# Altium PCB 3轴5.2-PCB-V3.3-2023.10.27.PcbDoc (part 1 of 2)
Units mm, origin at the board's own origin, x right, y up, seen from the top; angles counter-clockwise.
Board outline 152.4 x 101.6 mm, 2 copper layers (Top Layer, Bottom Layer); 198 components, 135 nets, 711 pads, 633 vias.
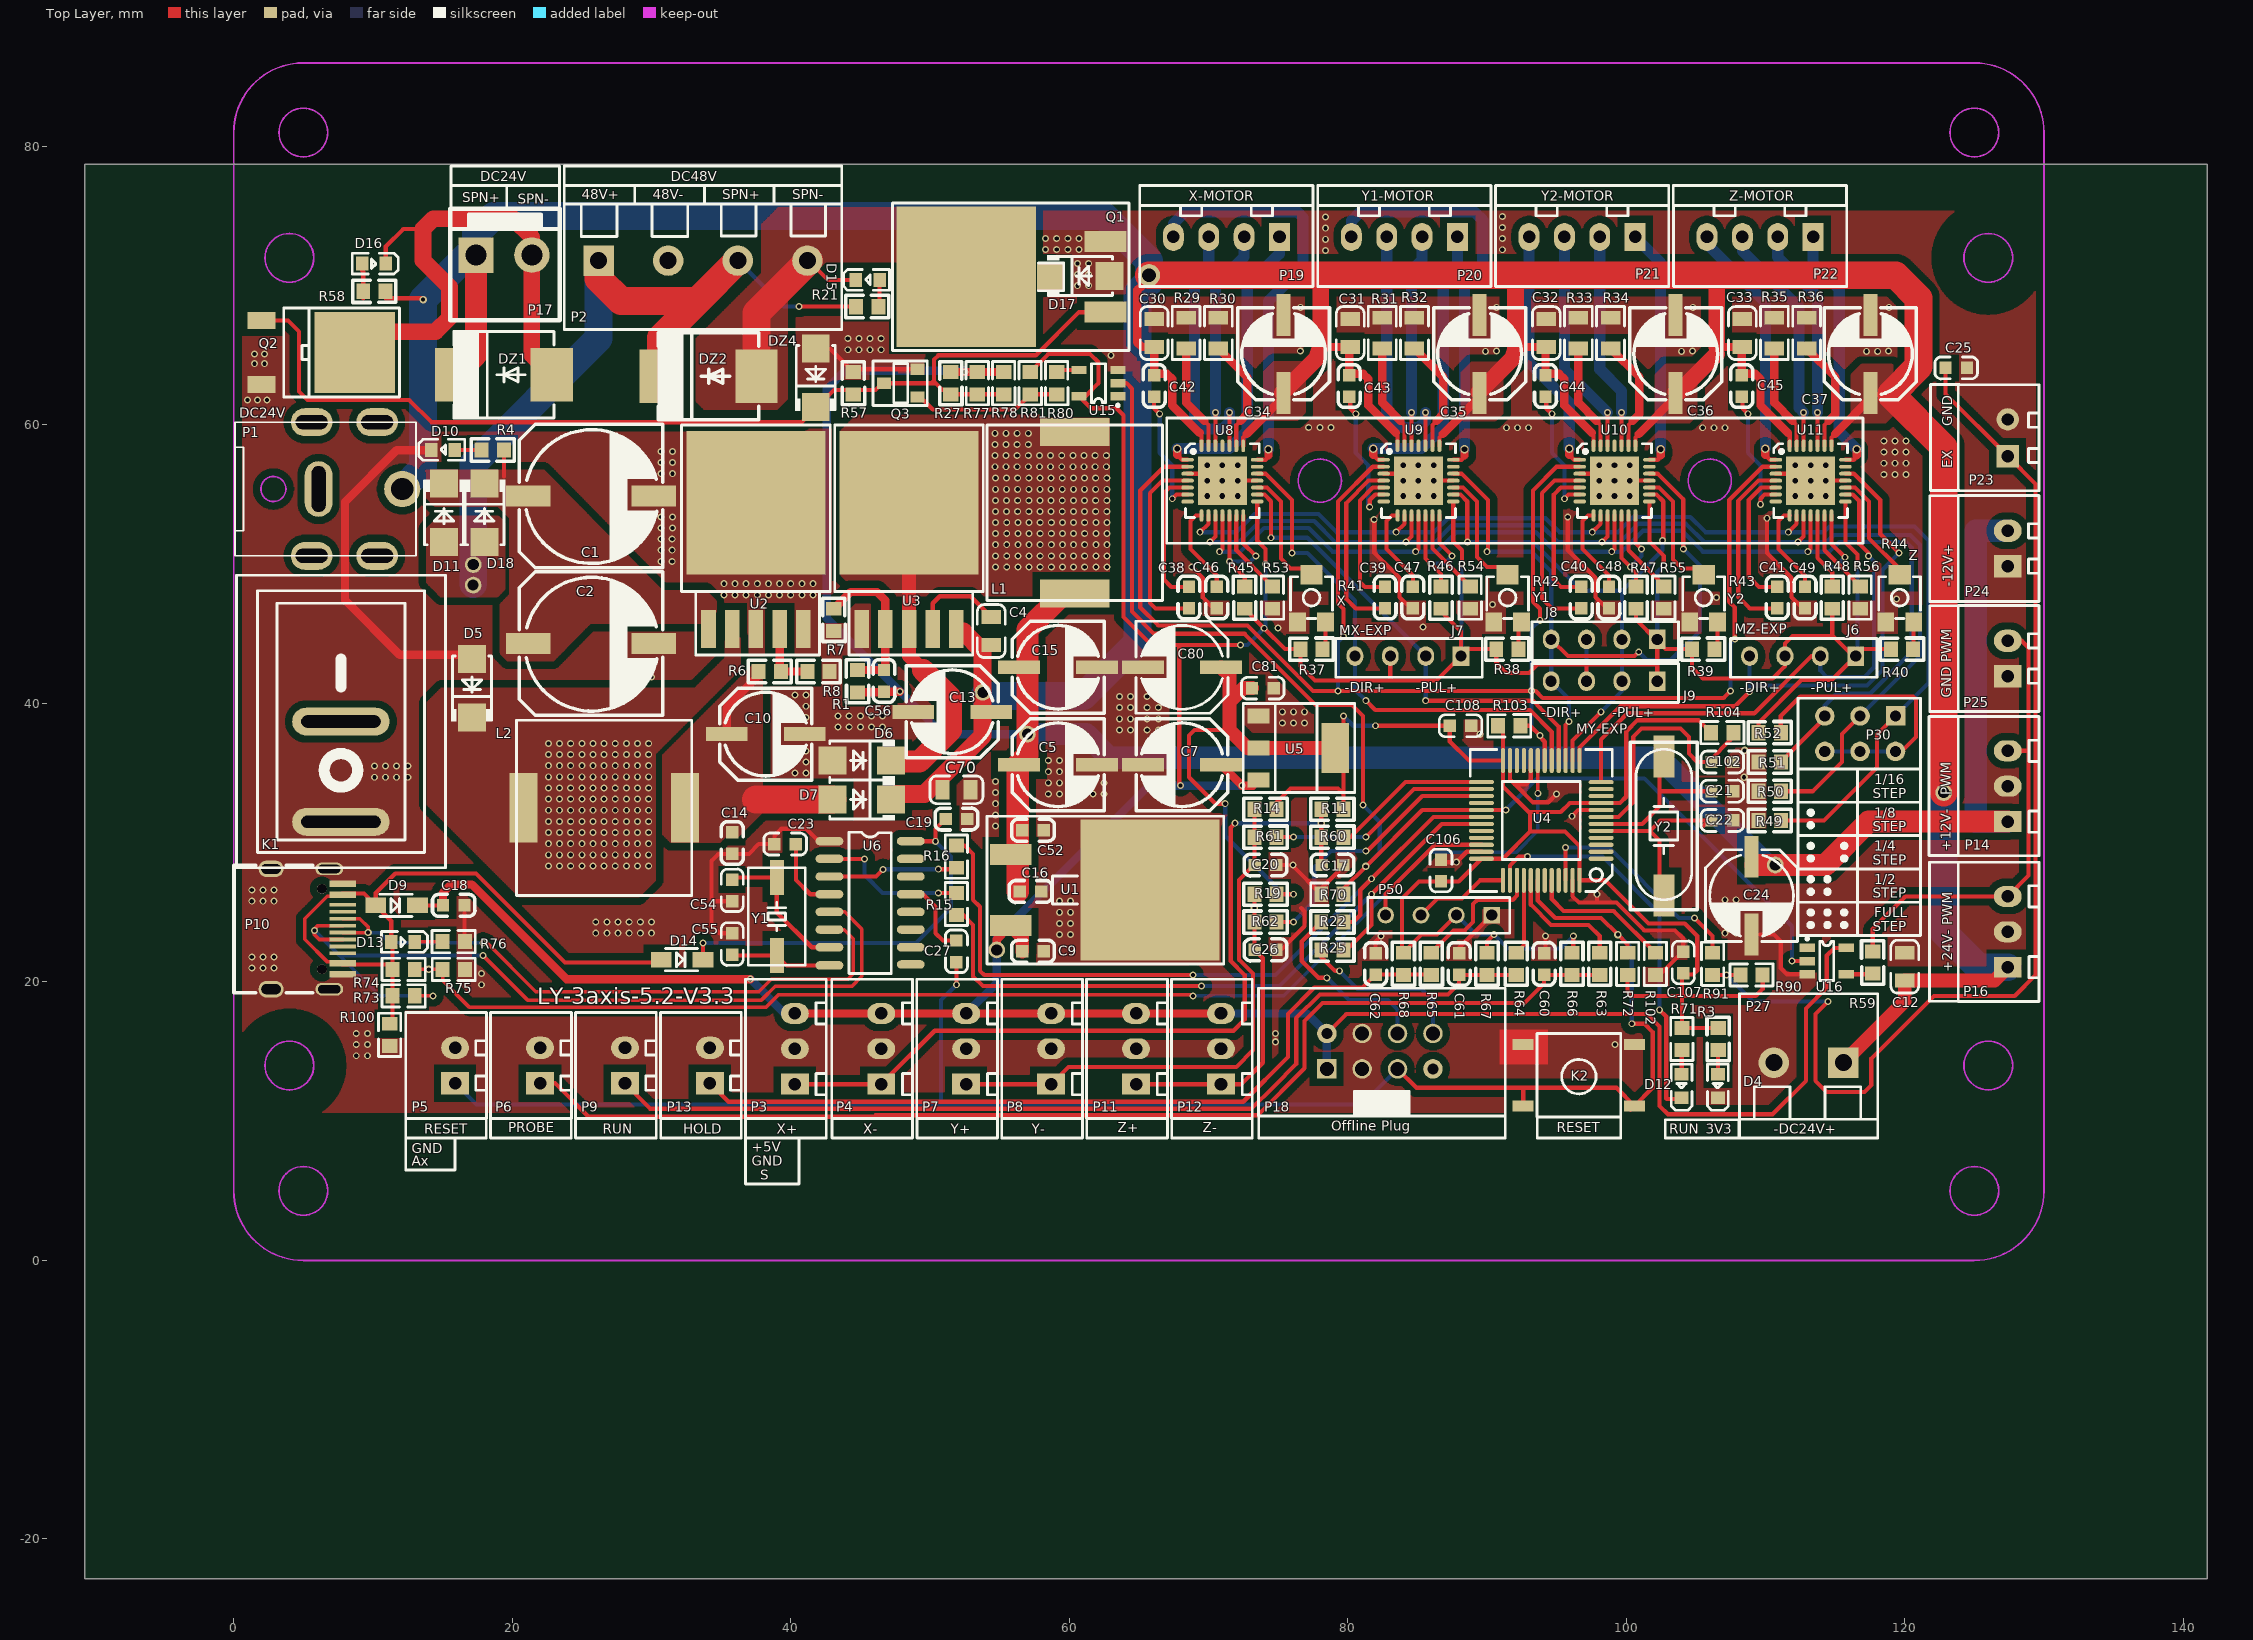
[diagram p0: Top Layer view]
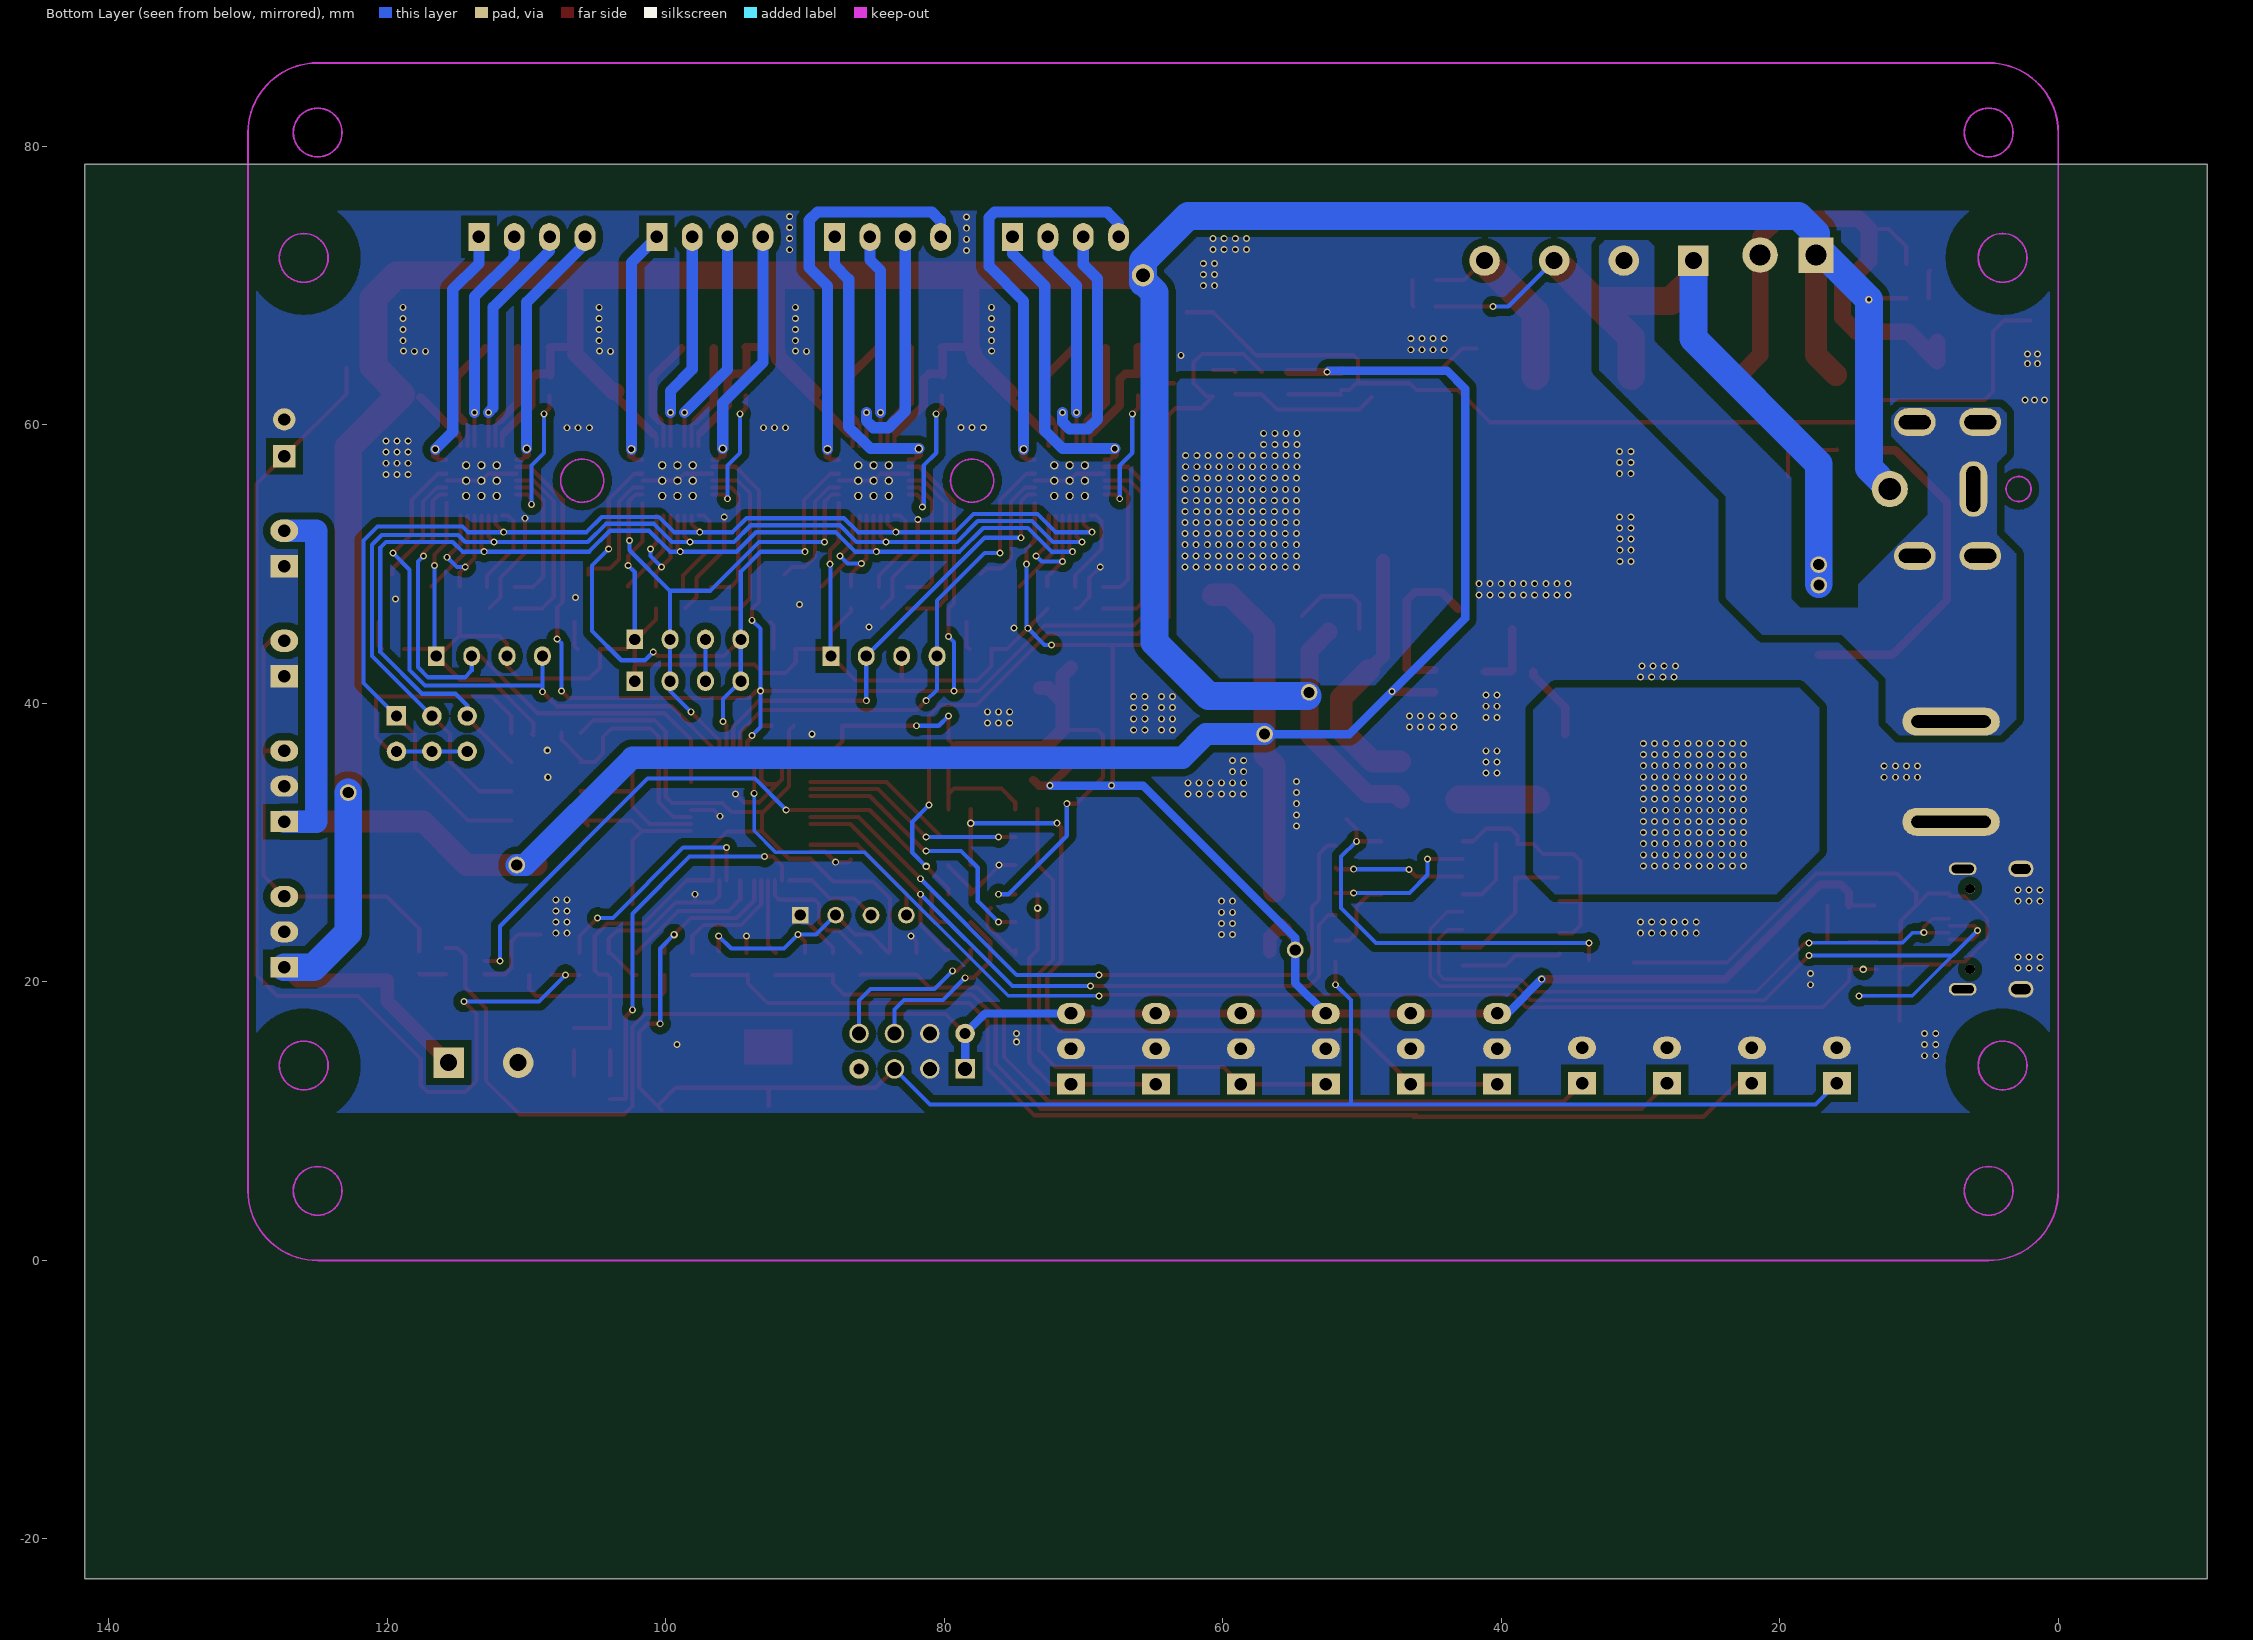
[diagram p1: Bottom Layer view, seen from below]

## Layer stack, top to bottom
Top Solder: solder mask 0.0102, Solder Resist, Dk 3.5
Top Layer: signal copper 0.0356
Dielectric1: dielectric 0.32, FR-4, Dk 4.8
Bottom Layer: signal copper 0.0356
Bottom Solder: solder mask 0.0102, Solder Resist, Dk 3.5

## Board outline
-10.686,-22.868 141.714,-22.868 141.714,78.732 -10.686,78.732

## Design rules (kind name [scope] priority, off if disabled: settings)
Clearance [All] p1: gap=0.178 ignorepadtopadclearanceinfootprint=FALSE except(0: Arc-Hole Track-Hole SMDPad-Hole THPad-Hole Via-Hole Fill-Hole Poly-Hole Region-Hole Text-Hole)
ComponentClearance [All] p1 off: gap=0.254 collisioncheckmode=3 verticalgap=0.254 showdistances=FALSE
MinimumSolderMaskSliver [All] p1 off: minsoldermaskwidth=0.254
PolygonConnect [All] p1: connectstyle=Direct reliefconductorwidth=0.3 reliefentries=4 polygonreliefangle="90 Angle" airgapwidth=0.254
RoutingVias [All] p1: holewidth=0.6 width=0.8 viastyle="Through Hole" minholewidth=0.3 minwidth=0.3 maxholewidth=2 maxwidth=1.27
SilkToSilkClearance [All] p1 off: silktosilkclearance=0.254
SilkToSolderMaskClearance SilkscreenOverComponentPads [IsPad] p1 off: minsilkscreentomaskgap=0.254 clearancetoexposedcopper=TRUE
SolderMaskExpansion [All] p1: expansion=0.102 istentingtop=FALSE
Width [All] p1: maxlimit=5 minlimit=0.01 preferedwidth=0.254
26 further rules are at their usual default settings.

## Components (designator, comment, footprint, x,y, rotation, side; value= is the part's Value field where it differs from the comment)
C1 "100uF/63V" 电解电容贴片10x10 25.4,54.8 r0 top
C2 "100uF/63V" 电解电容贴片10x10 25.4,44.2 r0 top
C4 "105" 0805C 54.4,45.2 r270 top
C5 "100uF/35V" 电解电容贴片6X6 59.2,35.6 r0 top
C7 "100uF/35V" 电解电容贴片6X6 68.1,35.6 r180 top
C9 "104" 0603C 57.4,22.2 r180 top
C10 "100uF/35V" 电解电容贴片6X6 38.2,37.8 r0 top
C12 "105" 0805C 120,21.1 r90 top
C13 "100uF/35V" 电解电容贴片6X6 51.6,39.4 r180 top
C14 "104" 0603C 35.8,29.975 r90 top
C15 "100uF/35V" 电解电容贴片6X6 59.2,42.6 r0 top
C16 "104" 0603C 57.225,26.5 r180 top
C17 "103" 0603C 78.9,28.4 r180 top
C18 "104" 0603C 15.8,25.5 r180 top
C19 "104" 0603C 51.9,31.7 r180 top
C20 "103" 0603C 74.1,28.4 r180 top
C21 "22pF" 0603C 106.9,33.7 r0 top
C22 "22pF" 0603C 106.9,31.6 r0 top
C23 "103" 0603C 39.6,29.9 r180 top
C24 "100uF/35V" 电解电容贴片6x6 109,26.2 r270 top
C25 "103?" 0603C 123.7,64.1 r180 top
C26 "103" 0603C 74.1,22.3 r180 top
C27 "104" 0603C 51.9,22.2 r270 top
C30 "105" 0805C 66.1,66.6 r90 top
C31 "105" 0805C 80.18,66.6 r90 top
C32 "105" 0805C 94.26,66.6 r90 top
C33 "105" 0805C 108.34,66.6 r90 top
C34 "47uF/50V" 电解电容贴片6X6 75.393,65.1 r90 top
C35 "47uF/50V" 电解电容贴片6X6 89.473,65.1 r90 top
C36 "47uF/50V" 电解电容贴片6X6 103.553,65.1 r90 top
C37 "47uF/50V" 电解电容贴片6X6 117.533,65.1 r90 top
C38 "104" 0603C 68.6,47.6 r90 top
C39 "104" 0603C 82.68,47.6 r90 top
C40 "104" 0603C 96.76,47.6 r90 top
C41 "104" 0603C 110.84,47.6 r90 top
C42 "104" 0603C 66.1,62.8 r90 top
C43 "104" 0603C 80.1,62.8 r90 top
C44 "104" 0603C 94.2,62.8 r90 top
C45 "104" 0603C 108.3,62.8 r90 top
C46 "224" 0603C 70.6,47.6 r270 top
C47 "224" 0603C 84.68,47.6 r270 top
C48 "224" 0603C 98.76,47.6 r270 top
C49 "224" 0603C 112.84,47.6 r270 top
C52 "104" 0603C 57.4,30.9 r180 top
C54 "33pF" 0603C 35.8,26.575 r270 top
C55 "33pF" 0603C 35.8,22.725 r90 top
C56 "33nF" 0603C 46.7,41.625 r270 top
C60 "103" 0603C 94.1,21.3 r270 top
C61 "103" 0603C 88,21.3 r270 top
C62 "103" 0603C 82,21.3 r270 top
C70 "105" 0805C 51.9,33.8 r0 top
C80 "100uF/35V" 电解电容贴片6x6 68.1,42.6 r180 top
C81 "104" 0603C 73.9,41.1 r180 top
C102 "104" 0603C 106.9,35.8 r180 top
C106 "104" 0603C 86.7,28 r270 top
C107 "104" 0603C 104.1,21.4 r270 top
C108 "104" 0603C 88.1,38.4 r180 top
D4 "红光" 0603LED 106.6,12.5 r270 top
D5 "SS56" SMA 17.114,41.1 r90 top
D6 "SS56" SMA 45.1,35.9 r180 top
D7 "SS56" SMA 45.1,33.1 r180 top
D9 "S4" SOD-123 11.7,25.5 r0 top
D10 "红光" 0603LED 15,58.2 r180 top
D11 "SS56" SMA 15.1,53.7 r270 top
D12 "绿光" 0603LED 104,12.5 r270 top
D13 "红光" 0603LED 12.2,22.9 r0 top
D14 "S4" SOD-123 32.2,21.6 r0 top
D15 "绿光" 0603LED 45.5,70.4 r180 top
D16 "绿光" 0603LED 10.1,71.6 r0 top
D17 "SS56" SMA 60.8,70.7 r0 top
D18 "SS56" SMA 18,53.7 r270 top
DZ1 "快恢复二极管RS2M" SMC 19.4,63.6 r0 top
DZ2 "快恢复二极管RS2M" SMC 34.1,63.5 r0 top
DZ4 "稳压二极管SMAZ10V" SMA 41.8,63.4 r90 top
J6 "4P" SIP4#1 116.48,43.4 r180 top
J7 "4P" SIP4#1 88.14,43.4 r180 top
J8 "4P" SIP4#1 102.23,44.6 r180 top
J9 "4P" SIP4#1 102.23,41.6 r180 top
K1 "按键" 船型开关KCD1-101 7.7,38.7 r180 top
K2 "按键" 按键6x6贴片 96.6,13.3 r270 top
L1 "47uH/5A" 电感贴片12X12 60.4,53.7 r270 top
L2 "47uH/5A" 电感贴片12X12 26.6,32.5 r0 top
P1 "DC007B" DC007B 0.1,55.4 r180 top
P2 "KF300" 直插座4P-KF300 26.2,71.8 r0 top
P3 "3P" HDR1X3_CON 40.3,15.2 r90 top
P4 "3P" HDR1X3_CON 46.5,15.2 r90 top
P5 "2P" HDR1X2_CON#1 15.9,14 r90 top
P6 "2P" HDR1X2_CON#1 22,14 r90 top
P7 "3P" HDR1X3_CON 52.6,15.2 r90 top
P8 "3P" HDR1X3_CON 58.7,15.2 r90 top
P9 "2P" HDR1X2_CON#1 28.1,14 r90 top
P10 "USB座TYPE-C-16P" USB-TYPE-C-16P 5.1,23.8 r270 top
P11 "3P" HDR1X3_CON 64.8,15.2 r90 top
P12 "3P" HDR1X3_CON 70.9,15.2 r90 top
P13 "2P" HDR1X2_CON#1 34.2,14 r90 top
P14 "3P" HDR1X3_CON 127.4,34.06 r90 top
P16 "3P" HDR1X3_CON 127.4,23.6 r90 top
P17 "2P" VH3.96-2P直插座 19.551,73.039 r180 top
P18 "8P" IDC8 82.312,14.779 r0 top
P19 "4P" HDR1X4_CON 75.1,73.5 r180 top
P20 "4P" HDR1X4_CON 87.88,73.5 r180 top
P21 "4P" HDR1X4_CON 100.64,73.5 r180 top
P22 "4P" HDR1X4_CON 113.42,73.5 r180 top
P23 "2P" HDR1X2_CON#2 127.4,59.08 r90 top
P24 "2P红色" HDR1X2_CON#1 127.4,51.13 r90 top
P25 "2P" HDR1X2_CON#1 127.4,43.23 r90 top
P27 "KF300" 直插座2P-KF300 115.6,14.2 r180 top
P30 "Header 3X2" HDR2X3 119.34,39.1 r180 top
P50 "" SIP4#2 90.34,24.8 r180 top
Q1 "F540NS" TO-263-2 62.6,70.64 r0 top
Q2 "F50N06" TO-252 4.6,65.2 r270 top
Q3 "SS8050" SOT-23 47.9,63 r90 top
R1 "16K" 0603R 44.8,41.6 r270 top
R3 "1K" 0603R 106.6,15.9 r270 top
R4 "10K" 0603R 18.6,58.2 r0 top
R6 "44.2K" 0603R 38.5,42.3 r180 top
R7 "1.8K" 0603R 43.1,46 r90 top
R8 "2.37K" 0603R 42,42.3 r180 top
R11 "10K" 0603R 78.9,32.4 r0 top
R14 "10K" 0603R 74.1,32.4 r0 top
R15 "680!!" 0603R 51.9,25.6 r270 top
R16 "100" 0603R 51.9,29 r90 top
R19 "10K" 0603R 74.1,26.3 r0 top
R21 "10K" 0603R 45.5,68.5 r0 top
R22 "100" 0603R 78.9,24.3 r180 top
R25 "100" 0603R 78.9,22.3 r180 top
R27 "1K" 0603R 51.5,63 r90 top
R29 "0.1" 0805R 68.4,66.6 r90 top
R30 "0.1" 0805R 70.713,66.6 r270 top
R31 "0.1" 0805R 82.48,66.6 r90 top
R32 "0.1" 0805R 84.793,66.6 r270 top
R33 "0.1" 0805R 96.56,66.6 r90 top
R34 "0.1" 0805R 98.873,66.6 r270 top
R35 "0.1" 0805R 110.64,66.6 r90 top
R36 "0.1" 0805R 112.953,66.6 r270 top
R37 "20K" 0603R 77.4,43.9 r180 top
R38 "20K" 0603R 91.467,43.9 r180 top
R39 "20K" 0603R 105.533,43.9 r180 top
R40 "20K" 0603R 119.8,43.9 r180 top
R41 "10K" 松下贴片电位器3x3 77.4,47.6 r0 top
R42 "10K" 松下贴片电位器3x3 91.48,47.6 r0 top
R43 "10K" 松下贴片电位器3x3 105.56,47.6 r0 top
R44 "10K" 松下贴片电位器3x3 119.64,47.6 r0 top
R45 "10K" 0603R 72.6,47.6 r90 top
R46 "10K" 0603R 86.7,47.6 r90 top
R47 "10K" 0603R 100.7,47.6 r90 top
R48 "10K" 0603R 114.8,47.6 r90 top
R49 "10K" 0603R 110.3,31.6 r180 top
R50 "10K" 0603R 110.3,33.7 r180 top
R51 "10K" 0603R 110.3,35.8 r180 top
R52 "100" 0603R 110.3,37.9 r0 top
R53 "0" 0603R 74.6,47.6 r90 top
R54 "0" 0603R 88.8,47.6 r90 top
R55 "0" 0603R 102.7,47.6 r90 top
R56 "0" 0603R 116.8,47.6 r90 top
R57 "10K" 0603R 44.5,63 r90 top
R58 "10K" 0603R 10.1,69.6 r180 top
R59 "100" 0603R 117.7,21.4 r90 top
R60 "100" 0603R 78.9,30.4 r180 top
R61 "100" 0603R 74.1,30.4 r180 top
R62 "100" 0603R 74.1,24.3 r180 top
R63 "100" 0603R 98.1,21.3 r270 top
R64 "100" 0603R 92.1,21.3 r270 top
R65 "100" 0603R 86,21.3 r270 top
R66 "10K" 0603R 96.1,21.3 r90 top
R67 "10K" 0603R 90,21.3 r90 top
R68 "10K" 0603R 84,21.3 r90 top
R70 "10K" 0603R 78.9,26.3 r0 top
R71 "1K" 0603R 104,15.9 r90 top
R72 "10K" 0603R 100.1,21.3 r90 top
R73 "10K" 0603R 12.2,19 r0 top
R74 "1K?" 0603R 12.2,20.9 r0 top
R75 "1.8K" 0603R 15.8,20.9 r0 top
R76 "1K" 0603R 15.8,22.9 r180 top
R77 "1K" 0603R 53.4,63 r90 top
R78 "1K" 0603R 55.3,63 r90 top
R80 "100" 0603R 59.1,63 r270 top
R81 "10K" 0603R 57.2,63 r90 top
R90 "10K" 0603R 109,20.5 r0 top
R91 "100" 0603R 106.2,21.3 r270 top
R100 "1K!!" 0603R 11.2,16.2 r90 top
R102 "10k" 0603R 102.1,21.3 r90 top
R103 "" 0603R 91.6,38.4 r180 top
R104 "10k" 0603R 106.9,37.9 r0 top
U1 "CJ7805" TO-263-2 55.8,26.6 r180 top
U2 "LM2576HVS-ADJ" TO-263 37.5,49.875 r0 top
U3 "XL4015" TO-263 48.5,49.875 r0 top
U4 "STM32F103C8T6/CBT6" LQFP48 93.9,31.6 r180 top
U5 "1117-3.3" SOT-223 76.3,36.8 r270 top
U6 "CH340G" SOP16 45.7,26.3 r0 top
U8 "HR4988SQ" QFN28 71.256,55.9 r270 top
U9 "HR4988SQ" QFN28 85.336,55.9 r270 top
U10 "HR4988SQ" QFN28 99.416,55.9 r270 top
U11 "HR4988SQ" QFN28 113.496,55.9 r270 top
U15 "74LVC1G04" SOT-23-5 62.1,63 r180 top
U16 "74LVC1G17" SOT-23-5 114.4,21.5 r0 top
Y1 "12M" 晶振贴片49SSMD 39,24.7 r90 top
Y2 "8M" 晶振贴片 102.7,31.2 r90 top

## Footprints (in the part's own frame and the unit in brackets; to place one, negate y for a bottom-side part, rotate by r counter-clockwise, add the part's x,y. Pads: shape width x height; smd on the part's side, far side on the other; paste and mask are expansions set on the pad)
0603C [mil]
  rect 35x35 smd: 1(-30.5,0) 2(30.5,0)
  silkscreen extent -60,-31 60,31
0603LED [mm]
  rect 0.9x1 smd: 1(-0.884,-0.017) 2(0.816,-0.017)
  silkscreen extent -1.58,-0.77 1.72,0.73
0603R [mm]
  rect 1x1.1 smd: 1(-0.8,0) 2(0.8,0)
  silkscreen extent -1.55,-0.8 1.55,0.81
0805C [mm] "Chip Capacitor; Body 2.0 x 1.2 mm (LxW typ)"
  rect 1x1.4 smd: 1(-1,0) 2(1,0)
  silkscreen extent -1.9,-1 1.9,1
0805R [mm] "Chip Capacitor; Body 2.0 x 1.2 mm (LxW typ)"
  rect 1x1.4 smd: 1(-1.1,0) 2(1.1,0)
  silkscreen extent -1.9,-1 1.9,1
DC007B [mm]
  round 2.6 hole 1.6: 1(-12,0)
  oval 2x4 hole 1 slot 3.3 at 90 deg: 2(-6,0)
  oval 3x2 hole 1 slot 2.3 at 0 deg: 3(-5.5,4.8) 4(-10.2,4.8) 5(-5.5,-4.8) 6(-10.2,-4.8)
  Keep-Out Layer circle w0.127: c-2.75,0 r0.9
  silkscreen extent -13,-4.8 0,4.8
HDR1X2_CON#1 [mm] "Connector; Header; 3 Position"
  rect 1.6x2 hole 0.9: 1(-1.27,0)
  oval 1.6x2 hole 0.9: 2(1.27,0)
  silkscreen extent -3.8,-2.25 3.8,3.55
HDR1X2_CON#2 [mm] "Connector; Header; 3 Position"
  rect 1.6x1.6 hole 0.88: 1(-1.32,0)
  round 1.6 hole 0.88: 2(1.32,0)
  silkscreen extent -3.8,-2.25 3.8,3.55
HDR1X3_CON [mm] "Connector; Header; 3 Position"
  rect 1.5x2 hole 0.9: 1(-2.54,0)
  oval 1.5x2 hole 0.9: 2(0,0) 3(2.54,0)
  silkscreen extent -5,-2.25 5,3.55
HDR1X4_CON [mm] "Connector; Header; 4 Position"
  rect 1.5x2 hole 0.9: 1(0,0)
  oval 1.5x2 hole 0.9: 2(2.54,0) 3(5.08,0) 4(7.62,0)
  silkscreen extent -2.41,-2.25 10.03,3.55
HDR2X3 [mm] "Connector; Header; 13x2 Position"
  rect 1.4x1.4 hole 0.8: 1(0,0)
  round 1.4 hole 0.8: 2(0,2.54) 3(2.54,0) 4(2.54,2.54) 5(5.08,0) 6(5.08,2.54)
  silkscreen extent -1.8,-1.27 7,3.81
IDC8 [mm]
  rect 1.4x1.4 hole 1: 1(-3.812,-1.019)
  round 1.4 hole 0.8: 2(-3.812,1.521) 7(3.808,-1.019)
  round 1.4 hole 1: 3(-1.272,-1.019) 4(-1.272,1.521) 5(1.268,-1.019) 6(1.268,1.521) 8(3.808,1.521)
  silkscreen extent -8.72,-4.41 9,4.77
LQFP48 [mm] "48-Pin Thin Quad Flat Pack 0.5 mm Pitch, IPC Low Density"
  oval 1.8x0.3 smd: 1(-4.3,2.75) 2(-4.3,2.25) 3(-4.3,1.75) 4(-4.3,1.25) 5(-4.3,0.75) 6(-4.3,0.25) 7(-4.3,-0.25) 8(-4.3,-0.75) 9(-4.3,-1.25) 10(-4.3,-1.75) 11(-4.3,-2.25) 12(-4.3,-2.75) 25(4.3,-2.75) 26(4.3,-2.25) 27(4.3,-1.75) 28(4.3,-1.25) 29(4.3,-0.75) 30(4.3,-0.25) 31(4.3,0.25) 32(4.3,0.75) 33(4.3,1.25) 34(4.3,1.75) 35(4.3,2.25) 36(4.3,2.75)
  oval 0.3x1.8 smd: 13(-2.75,-4.3) 14(-2.25,-4.3) 15(-1.75,-4.3) 16(-1.25,-4.3) 17(-0.75,-4.3) 18(-0.25,-4.3) 19(0.25,-4.3) 20(0.75,-4.3) 21(1.25,-4.3) 22(1.75,-4.3) 23(2.25,-4.3) 24(2.75,-4.3) 37(2.75,4.3) 38(2.25,4.3) 39(1.75,4.3) 40(1.25,4.3) 41(0.75,4.3) 42(0.25,4.3) 43(-0.25,4.3) 44(-0.75,4.3) 45(-1.25,4.3) 46(-1.75,4.3) 47(-2.25,4.3) 48(-2.75,4.3)
  silkscreen extent -5.1,-5.1 5.1,5.1
QFN28 [mm]
  oval 0.28x0.896 smd: 1(-1.601,-2.756) 2(-1.101,-2.756) 3(-0.601,-2.756) 4(-0.1,-2.756) 5(0.4,-2.756) 6(0.901,-2.756) 7(1.401,-2.756) 15(1.401,2.244) 16(0.901,2.244) 17(0.4,2.244) 18(-0.1,2.244) 19(-0.601,2.244) 20(-1.101,2.244) 21(-1.601,2.244)
  oval 0.896x0.28 smd: 8(2.4,-1.757) 9(2.4,-1.257) 10(2.4,-0.757) 11(2.4,-0.256) 12(2.4,0.244) 13(2.4,0.745) 14(2.4,1.245) 22(-2.6,1.245) 23(-2.6,0.745) 24(-2.6,0.244) 25(-2.6,-0.256) 26(-2.6,-0.757) 27(-2.6,-1.257) 28(-2.6,-1.757)
  rect 3.5x3.5 smd: 29(-0.1,-0.256)
  silkscreen extent -2.75,-2.91 2.55,2.39
SIP4#1 [mm] "Connector; Header; 4 Position"
  rect 1.2x1.4 hole 0.8: 1(0,0)
  oval 1.2x1.4 hole 0.8: 2(2.54,0) 3(5.08,0) 4(7.62,0)
  silkscreen extent -1.52,-1.27 9,1.52
SIP4#2 [mm] "Connector; Header; 4 Position"
  rect 1.2x1.2 hole 0.8: 1(0,0)
  round 1.2 hole 0.8: 2(2.54,0) 3(5.08,0) 4(7.62,0)
  silkscreen extent -1.3,-1.27 8.9,1.3
SMA [mm]
  rect 2x2 smd: 1(2.1,0) 2(-2.1,0)
  silkscreen extent -2.4,-1.4 2.3,1.5
SMC [mm]
  rect 3.03x3.82 smd: 1(3.435,0) 2(-3.435,0)
  silkscreen extent -3.66,-3.11 3.6,3.11
SOD-123 [mm]
  rect 1.5x1.1 smd: 1(-1.5,0) 2(1.5,0)
  silkscreen extent -1.2,-0.8 1.1,0.8
SOP16 [mm] "1.27mm Pitch,"
  oval 2x0.6 smd: 1(-2.921,3.81) 2(-2.921,2.54) 3(-2.921,1.27) 4(-2.921,0) 5(-2.921,-1.27) 6(-2.921,-2.54) 7(-2.921,-3.81) 8(-2.921,-5.11) 9(2.921,-5.04) 10(2.921,-3.81) 11(2.921,-2.54) 12(2.921,-1.27) 13(2.921,0) 14(2.921,1.27) 15(2.921,2.54) 16(2.921,3.81)
  silkscreen extent -1.52,-5.7 1.52,4.44
SOT-23 [mm]
  rect 0.8x1 smd: 1(-1,-1.2) 2(0,1.2) 3(1,-1.2)
  silkscreen extent -1.6,-1.9 1.6,2
SOT-23-5 [mm]
  rect 1.1x0.6 smd: 1(-1.4,0.95) 2(-1.4,0) 3(-1.4,-0.95) 4(1.4,-0.95) 5(1.4,0.95)
  silkscreen extent -1.5,-1.4 0.5,1.7
SOT-223 [mm] "SOT-223/SC-73; 4 Leads; Body 6.7 x 7.3 mm, inc. leads (LxW max)"
  rect 1.1x1.6 smd: 1(-2.3,-2.7) 2(0,-2.7) 3(2.3,-2.7)
  rect 3.6x2 smd: 4(0,2.8)
  silkscreen extent -3.2,-3.8 3.2,4.2
TO-252 [mm]
  rect 1.2x2 smd: 1(-2.3,-2.6) 3(2.3,-2.6)
  rect 5.8x5.8 smd: 2(0,4.1)
  silkscreen extent -3.2,-1 3.2,7.3
TO-263 [mm]
  rect 1.05x2.7 smd: 1(-3.4,-4.525) 2(-1.7,-4.525) 3(0,-4.525) 4(1.7,-4.525) 5(3.4,-4.525)
  rect 10x10.3 smd: 3(0,4.526)
  silkscreen extent -5.33,-6.4 5.33,10.11
TO-263-2 [mm]
  rect 3x1.5 smd: 1(0,-2.54) 3(0,2.54)
  rect 10x10.1 smd: 2(-10,0)
  silkscreen extent -15.3,-5.3 1.7,5.3
USB-TYPE-C-16P [mm]
  oval 0.9x2 hole 0.6 slot 1.6 at 90 deg: 1(-4.32,1.765) 2(4.32,1.765)
  oval 1.2x1.8 hole 0.7 slot 1.4 at 90 deg: 3(-4.32,-2.415) 4(4.32,-2.415)
  rect 0.26x1.9 smd: A1(-3.35,2.715) A4(-2.55,2.715) A5(-1.25,2.715) A6(-0.25,2.715) A7(0.25,2.715) A8(1.25,2.715) A9(2.55,2.715) A12(3.35,2.715) B1(3.15,2.715) B4(2.35,2.715) B5(1.75,2.715) B6(0.75,2.715) B7(-0.75,2.715) B8(-1.75,2.715) B9(-2.35,2.715) B12(-3.15,2.715)
  round 0.7 hole 0.7 unplated: ""(-2.89,1.235) ""(2.89,1.235)
  silkscreen extent -4.57,-5.08 4.57,0.57
VH3.96-2P直插座 [mil]
  rect 100x100 hole 60: 1(84.67,33.05)
  round 100 hole 60: 2(-73.33,33.05)
  silkscreen extent -152,-98 158,217
按键6x6贴片 [mm]
  rect 0.8x1.5 smd: 1(2.2,4) 2(-2.2,4) 3(2.2,-4) 4(-2.2,-4)
  silkscreen extent -3,-3 3,3
晶振贴片 [mm]
  rect 3x1.5 smd: 1(-5,0) 2(5,0)
  silkscreen extent -6,-2.4 6,2.4
晶振贴片49SSMD [mm]
  rect 2.5x1 smd: 1(-2.8,0) 2(2.8,0)
  silkscreen extent -3.5,-2.05 3.5,2.05
松下贴片电位器3x3 [mm]
  rect 1.2x1.4 smd: 1(-1,-1.75) 3(1,-1.75)
  rect 1.6x1.4 smd: 2(0,1.65)
  silkscreen extent -1.5,-1.5 1.5,1.5
电感贴片12X12 [mm]
  rect 2x5 smd: 1(-5.8,0) 2(5.8,0)
  silkscreen extent -6.3,-6.3 6.3,6.3
电解电容贴片6X6 [mm]
  rect 3x1 smd: 1(-2.8,0) 2(2.8,0)
  silkscreen extent -3.3,-3.3 3.3,3.3
电解电容贴片6x6 [mm]
  rect 3x1 smd: 1(-2.8,0) 2(2.8,0)
  silkscreen extent -3.3,-3.3 3.3,3.3
电解电容贴片10x10 [mm]
  rect 3.2x1.5 smd: 1(-4.242,0.097) 2(4.758,0.097)
  silkscreen extent -4.89,-5.05 5.41,5.25
直插座2P-KF300 [mil]
  rect 86x86 hole 48: 1(0,0)
  round 86 hole 48: 2(196.85,0)
  silkscreen extent -97,-195 294,160
直插座4P-KF300 [mil]
  rect 86x86 hole 48: 1(0,0)
  round 86 hole 48: 2(196.85,0) 3(393.7,0) 4(590.55,0)
  silkscreen extent -97,-195 688,160
船型开关KCD1-101 [mm]
  oval 7x2 hole 0.88 slot 5.7 at 0 deg: 1(0,0) 2(0,7.2)
  silkscreen extent -7.5,-10.5 7.5,10.5

## Part data
C1 C2 C5 C7 C10 C13 C15 C24 C34 C35 C36 C37 C80: library part ELECTRO1
C4 C12 C14 C16 C17 C20 C25 C26 C30 C31 C32 C33 C38 C39 C40 C41 C42 C43 C44 C45 C46 C47 C48 C49 C56 C60 C61 C62 C70 C106 C107 C108: library part CAP
C9 C18 C19 C21 C22 C23 C27 C52 C54 C55 C81 C102: library part "Cap Semi", "Capacitor (Semiconductor SIM Model)"
D4 D10 D12 D13 D15 D16: library part LED
D5 D6 D7 D9 D11 D14 D17 D18: library part 1N4148
DZ1 DZ2 DZ4: library part 稳压二极管
L1 L2: library part Inductor, "Inductor"
P1: library part 6P
P2 P50: library part 4P
P24 P27: library part 2P
P30: "Header, 3-Pin, Dual row"
Q1 Q2: library part MOSFET-N, "N-Channel MOSFET"
Q3: library part NPN
R1 R3 R4 R6 R7 R8 R11 R14 R15 R16 R19 R21 R22 R25 R27 R29 R30 R31 R32 R33 R34 R35 R36 R37 R38 R39 R40 R45 R46 R47 R48 R49 R50 R51 R52 R53 R54 R55 R56 R57 R58 R59 R60 R61 R62 R63 R64 R65 R66 R67 R68 R70 R71 R72 R73 R74 R75 R76 R77 R78 R80 R81 R90 R91 R100 R102 R103 R104: library part RES, "Resistor"
R41 R42 R43 R44: library part 电位器
U1: library part 7805
U2: library part LM2576S-5.0, "Simple Switcher 3A Step Down Voltage Regulator"
U3: library part XL4005
U4: library part STM32F103C6T6, "STM32 ARM-based 32-bit MCU with 32 Kbytes Flash, 48-pin LQFP, Industrial Temperature"
U5: library part LM1117
U6: library part DIP16
U8 U9 U10 U11: library part HR4988
U15: library part 74LVC1G17
Y1 Y2: library part XTAL, "Crystal Oscillator"

## Free pads (board coordinates)
  round 1.6 hole 1: 0(65.734,70.748)
  round 0.6 hole 0.4: 0(67.75,58.3) 0(81.83,58.3) 0(95.91,58.3) 0(109.99,58.3) 3(74.307,58.257) 3(88.387,58.257) 3(102.467,58.257) 3(116.547,58.257) 4(71,57.1) 4(85.08,57.1) 4(99.16,57.1) 4(113.24,57.1) 5(69.9,54.9) 5(69.9,56) 5(69.9,57.1) 5(71,54.9) 5(71,56) 5(72.1,54.9) 5(72.1,56) 5(72.1,57.1) 5(83.98,54.9) 5(83.98,56) 5(83.98,57.1) 5(85.08,54.9) 5(85.08,56) 5(86.18,54.9) 5(86.18,56) 5(86.18,57.1) 5(98.06,54.9) 5(98.06,56) 5(98.06,57.1) 5(99.16,54.9) 5(99.16,56) 5(100.26,54.9) 5(100.26,56) 5(100.26,57.1) 5(112.14,54.9) 5(112.14,56) 5(112.14,57.1) 5(113.24,54.9) 5(113.24,56) 5(114.34,54.9) 5(114.34,56) 5(114.34,57.1)
  rrect70% 0.6x1.6 on Top Overlay: 0(113.3,34.1) 0(114.5,29.31) 0(114.5,31.7) 0(114.5,34.1) 0(115.7,26.92) 0(115.7,31.7) 0(115.7,34.1)
  round 1.2 hole 0.8: 1(17.194,48.5) 1(17.2,49.972) 1(53.8,40.8) 1(54.8,22.3) 1(57,37.8) 1(110.7,28.4) 1(122.8,33.6)

## Via types
v1: diameter 0.5, hole 0.3, Top Layer to Bottom Layer, 619 vias
v2: diameter 0.53, hole 0.3, Top Layer to Bottom Layer, 14 vias

## Nets (pads, with @x,y where several pads share a name; then routed paths per layer and width w, separated by ;. In a path a pad name is that pad's centre, name@x,y a point inside that pad or via, vN(x,y) a via of type N, cw(c..) or ccw(c..) an arc to the next point about the centre after c; other vN are vias at no path point)
3V3: C80.1 C81.2 C106.2 C107.2 C108.2 P50.2 R3.1 R11.2 R14.2 R19.2 R66.2 R67.2 R68.2 R71.2 R72.1 R90.2 R103.2 R104.1 U4.9 U4.24 U4.36 U4.48 U5.2 U5.4 | length 159.6
  Top Layer w0.3: v1(71.2,32.8) 70.5,32.8 68.6,34.7 68.6,37.7 69,38.1 71.5,38.1 ; R19.2@74.9,26.3 v1(76.1,26.3) ; R14.2@74.9,32.4 74.9,32.9 75.9,33.9 79.3,33.9 79.7,33.5 ; R11.2@79.7,32.4 79.7,33.5 ; v1(79.7,39.1) 79.7,37.4 U5.4@79.1,36.8 79.7,36.2 79.7,33.5 ; v1(82,38.4) C108.2@87.325,38.4 87.325,37.275 88.7,35.9 U4.24@91.15,35.9 ; P50.2@87.8,24.8 86.4,23.4 85.3,23.4 R68.2@84,22.1 83.9,22.2 83.9,26 85.125,27.225 C106.2@86.7,27.225 87.975,27.225 U4.36@89.6,28.85 91.15,28.85 93.1,30.8 ; R67.2@90,22.1 90,22.9 v1(90.5,23.4) ; R103.2@90.8,38.4 91.15,38.05 U4.24@91.15,35.9 ; R66.2@96.2,22.2 v1(96.2,23.3) ; R72.1@100.1,20.5 100.1,19.3 100.4,19 103.9,19 ; R104.1@106.1,37.9 105.2,38.8 100.8,38.8 100,38 100,33.3 99.55,32.85 U4.9@98.2,32.85 95.95,32.85 95.3,32.2 93,32.2 ; R3.1@106.6,16.7 R71.2@104,16.7 104,19 ; R90.2@109.8,20.5 109.8,19.5 109.3,19 104,19 ; U4.24@91.15,35.9 91.15,34.05 93,32.2 ; 93,32.2 93.1,32.1 93.1,30.8 ; 93.1,30.8 95.6,30.8 96.65,29.75 U4.48@96.65,27.3 98.5,27.3 101.6,24.2 104.2,24.2 105.1,23.3 105.1,22.1 105.1,20.825 104.8,20.525 104.2,20.525 104,20.325 104,19
  Top Layer w1: C80.1@70.9,42.6 71.5,42 71.5,40.1 ; C81.2@73.125,41.1 72.5,41.1 71.5,40.1 ; U5.4@79.1,36.8 U5.2@73.6,36.8 72.8,36.8 71.5,38.1 71.5,40.1
  Bottom Layer w0.3: v1(71.2,32.8) 71.2,30.5 75.4,26.3 v1(76.1,26.3) ; v1(79.7,39.1) 80.4,38.4 v1(82,38.4) ; P50.2@87.8,24.8 89.2,23.4 v1(90.5,23.4) 91.5,22.4 95.3,22.4 v1(96.2,23.3)
12V: C5.1 C15.1 C16.2 C24.1 C52.2 C56.2 L1.2 P14.1 P24.2 pad.1@57,37.8 pad.1@110.7,28.4 R1.2 R27.2 R77.2 R78.2 U1.1 | length 178
  Top Layer w0.6: R1.2@44.8,40.8 46.65,40.8 C56.2@46.7,40.851 v1(47.851,40.851) ; R27.2@51.4,63.9 R27.2@51.5,63.8 v1(52.5,63.8) R77.2@53.4,63.8 R78.2@55.3,63.8
  Top Layer w1.6: C16.2@56.3,26.5 56.3,35.6 57,36.3 57,45.3 59.5,47.8 L1.2@60.7,47.8 ; C24.1@109.3,28.4 pad.1@110.7,28.4 114.3,28.4 117.42,31.52 P14.1@127.4,31.52
  Bottom Layer w0.6: v1@52.428,63.9 43.9,63.9 42.6,62.6 42.6,46.101 v1(47.851,40.851) 50.901,37.8 pad.1@57,37.8
  Bottom Layer w1.6: pad.1@57,37.8 61.2,37.8 62.9,36.1 102.4,36.1 110.1,28.4 pad.1@110.7,28.4 ; P14.1@127.4,31.52 127.38,31.5 125.1,31.5 125.1,52.4 P24.2@127.4,52.4
24V: C4.2 C12.1 C13.1 C30.1 C31.1 C32.1 C33.1 C34.1 C35.1 C36.1 C37.1 C42.2 C43.2 C44.2 C45.2 C70.1 D7.2 DZ1.2 P1.1 P16.1 P17.1 P27.1 pad.0@65.734,70.748 pad.1@53.8,40.8 pad.1@122.8,33.6 R58.1 U3.5 U8.22 U8.28 U9.22 U9.28 U10.22 U10.28 U11.22 U11.28 | length 362.8
  Top Layer w0.3: R58.1@10.9,69.1 v2@13.5,69.1 ; U8.28@69.499,58.5 69.499,59.301 ; U8.22@72.501,58.5 72.501,59.101 72.7,59.3 ; U9.28@83.579,58.5 83.579,59.301 ; U9.22@86.581,58.5 86.581,59.101 86.78,59.3 ; U10.28@97.659,58.5 97.659,59.301 ; U10.22@100.661,58.5 100.661,59.101 100.86,59.3 ; U11.28@111.739,58.5 111.739,59.301 ; U11.22@114.741,58.5 114.741,59.101 114.94,59.3
  Top Layer w0.6: pad.0@65.734,70.348 64.874,69.688 64.874,65.938 65.212,65.6 C30.1@66.1,65.6 66.1,63.675 67.025,63.675 67.4,63.3 67.4,61.4 69.371,59.429 ; 72.75,59.35 75.393,61.993 C34.1@75.393,62.4 ; 78.029,65.6 C31.1@80.18,65.6 80.1,65.52 C43.2@80.1,63.575 ; C43.2@80.18,63.675 81.105,63.675 81.48,63.3 81.48,61.4 83.451,59.429 ; 86.83,59.35 C35.1@89.473,61.993 ; 92.042,65.6 C32.1@94.26,65.6 94.2,65.54 C44.2@94.2,63.575 ; C44.2@94.26,63.675 95.185,63.675 95.56,63.3 95.56,61.4 97.531,59.429 ; 100.91,59.35 C36.1@103.553,61.993 ; 106.5,65.6 C33.1@108.34,65.6 108.3,65.56 C45.2@108.3,63.575 ; C45.2@108.34,63.675 109.265,63.675 109.64,63.3 109.64,61.4 111.611,59.429 ; 114.99,59.35 C37.1@117.633,61.993
  Top Layer w1: P27.1@116.2,14.8 P27.1@115.6,14.2 120,18.6 C12.1@120,20.1 126.44,20.1 P16.1@127.4,21.06
  Top Layer w1.2: pad.0@65.734,70.348 pad.0@66.085,70.7 ; C34.1@75.315,62.322 75.393,62.4 77.762,64.768 78.029,65.6 ; 78.062,65.7 78.062,70.348 ; C35.1@89.423,62.35 91.842,64.768 92.042,65.4 ; 92.042,65.6 92.042,70.348 ; C36.1@103.553,62.4 103.808,62.4 106.5,65.092 ; 106.5,65.6 106.5,70.348
  Top Layer w1.3: D7.2@47.2,33.1 47.6,33.5 49.6,33.5 53.772,37.672 53.772,43.777 U3.5@52.4,45.149
  Top Layer w1.6: DZ1.2@15.965,63.6 17.4,65.035 P17.1@17.4,72.2 P17.1@17.4,72.4
  Top Layer w2: pad.0@65.734,70.748 119.352,70.748 121,69.1 121,64.189 119.005,62.195 122.8,58.4 pad.1@122.8,33.6
  Bottom Layer w1.2: 124.74,21.06 125.3,21.06
  Bottom Layer w1.6: P1.1@12.1,55.1 P1.1@12.25,55.25 ; P17.1@17.4,72.2 16.8,72.2 P17.1@17.4,72.8
  Bottom Layer w2: P1.1@12.1,55.4 13.6,56.9 v2(13.6,69) P17.1@16.8,72.2 ; P17.1@17.4,72.2 17.4,72.8 17.4,73.752 18.648,75 62.5,75 64.25,73.25 ; pad.1@53.897,40.525 61.025,40.525 64.9,44.4 64.9,69.515 pad.0@65.734,70.348 ; 64.95,72.55 64.25,73.25 ; pad.0@65.734,70.23 pad.0@65.734,70.348 ; pad.1@122.8,33.6 122.8,23.56 125.3,21.06 P16.1@127.4,21.06 ; 64.25,73.25 65.734,71.766 pad.0@65.734,70.348
48V1: C1.1 C2.1 D11.2 D18.2 R4.2 U2.1 | length 1.9
  Top Layer w0.3: 19.4,56.3 R4.2@19.4,58.2
48V_IN: D11.1 D18.1 DZ2.2 P2.1 P2.3 pad.1@17.2,49.972 pad.1@17.194,48.5 R21.1 | length 56.5
  Top Layer w0.3: v1(40.6,68.5) R21.1@44.7,68.5
  Top Layer w2: P2.1@26.2,71.8 26.2,70.5 27.8,68.9 33.3,68.9 ; DZ2.2@30.665,63.5 30.665,66.265 33.3,68.9 ; P2.3@36.2,71.8 33.3,68.9
  Bottom Layer w0.3: P2.3@36.2,71.8 39.5,68.5 v1(40.6,68.5)
  Bottom Layer w2: pad.1@17.2,48.58 17.2,57.2 26.2,66.2 P2.1@26.2,71.8
48V_SPN-: D15.2 D17.2 DZ2.1 P2.4 Q1.2 | length 13.4
  Top Layer w0.3: P2.4@41.594,71.5 42.677,70.417 D15.2@44.684,70.417
  Top Layer w2: DZ2.1@37.535,63.5 37.535,68.035 P2.4@41.317,71.817
A_LIMT: U4.28
BOOT0: R102.2 U4.44 | length 10.4
  Top Layer w0.3: U4.44@94.65,27.3 94.65,25.95 95.5,25.1 99.1,25.1 R102.2@102.1,22.1
EXIO: R91.1 U4.46 | length 16.7
  Top Layer w0.3: U4.46@95.65,27.3 v1(95.65,29.65) ; v1(104.9,24.6) 106.2,23.3 R91.1@106.2,22.1
  Bottom Layer w0.3: v1(95.65,29.65) 98.75,29.65 103.8,24.6 v1(104.9,24.6)
GND: C1.2 C2.2 C5.2 C7.2 C9.1 C10.2 C12.2 C13.2 C14.1 C15.2 C16.1 C17.1 C18.1 C19.1 C20.1 C21.2 C22.2 C23.2 C24.2 C25.1 C26.1 C30.2 C31.2 C32.2 C33.2 C34.2 C35.2 C36.2 C37.2 C46.2 C47.2 C48.2 C49.2 C52.1 C54.2 C55.2 C60.1 C61.1 C62.1 C70.2 C80.2 C81.1 C102.1 C106.1 C107.1 C108.1 D4.2 D5.1 D6.1 D10.2 D17.1 DZ4.1 K1.2 K2.2 K2.4 P3.2 P4.2 P5.2 P6.2 P7.2 P8.2 P9.2 P10.1 P10.2 P10.3 P10.4 P10.A1 P10.A12 P10.B1 P10.B12 P11.2 P12.2 P13.2 P14.2 P16.2 P18.3 P18.4 P23.2 P24.1 P25.1 P27.2 P50.1 pad.4 pad.5 Q1.3 Q2.3 Q3.3 R7.1 R8.1 R29.2 R30.1 R31.2 R32.1 R33.2 R34.1 R35.2 R36.1 R41.1 R42.1 R43.1 R44.1 R49.2 R50.2 R51.2 R53.1 R54.1 R55.1 R56.1 R57.2 R70.1 R75.2 R76.1 R100.1 R102.1 U1.2 U2.3 U2.5 U3.1 U4.8 U4.20 U4.23 U4.35 U4.47 U5.1 U6.1 U8.3 U8.18 U8.29 U9.3 U9.18 U9.29 U10.3 U10.18 U10.29 U11.3 U11.18 U11.29 U15.3 U16.3 | length 154.8
  Top Layer w0.3: C18.1@16.575,25.5 16.575,22.925 R76.1@16.6,22.9 ; C55.2@35.8,23.5 34.9,23.5 34.3,24.1 34.3,25.8 ; C54.2@35.8,25.8 34.3,25.8 ; DZ4.1@41.8,65.5 42.8,65.5 R57.2@44.5,63.8 44.7,64 Q3.3@49.1,64 ; U6.1@42.779,30.11 41.99,30.11 41.1,31 39.325,31 38.825,30.5 C23.2@38.825,29.9 37.7,29.9 37,29.2 C14.1@35.8,29.2 34.8,29.2 34.3,28.7 34.3,25.8 ; U8.3@68.5,56.5 70.5,56.5 U8.29@71,56 U8.18@73.5,56 ; v1(68.8,49.794) 69.594,49 69.594,47.6 70.368,46.825 C46.2@70.6,46.825 ; C26.1@74.875,22.3 74.875,21.975 76.9,24 76.9,25.064 76.664,25.3 ; C20.1@74.875,28.4 v1(76.075,28.4) 76.075,28.325 R70.1@78.1,26.3 78.1,26.7 79.675,28.275 C17.1@79.675,28.4 ; 81.9,51.9 81.9,51.7 ; v1(81.9,53.2) 81.9,51.7 ; C62.1@82,22.075 82,22.9 v1(82.4,23.3) ; U9.3@82.58,56.5 84.58,56.5 U9.29@85.08,56 U9.18@87.58,56 ; 82.926,49.819 83.173,49.573 ; C47.2@84.495,46.851 83.72,47.625 83.72,49.025 83.173,49.573 ; C106.1@86.7,28.775 86.875,28.6 v1(87.8,28.6) 88.55,29.35 U4.35@89.6,29.35 ; C61.1@88,22.075 88,22.46 P50.1@90.34,24.8 ; U4.23@91.65,35.9 91.65,34.55 92,34.2 ; U4.20@93.15,35.9 93.15,34.55 92.8,34.2 92,34.2 ; C60.1@94.2,22.075 v1(94.2,23.3) ; v1(95,33.5) 94.4,32.9 93.3,32.9 92,34.2 ; v1(95.8,53.4) 95.8,51.025 97.8,49.025 97.8,47.625 C48.2@98.575,46.851 ; v1(96.1,31.9) 96.55,32.35 U4.8@98.2,32.35 ; U4.47@96.15,27.3 96.15,26.15 96.6,25.7 97.9,25.7 ; U10.3@96.66,56.5 98.66,56.5 U10.29@99.16,56 U10.18@101.66,56 ; v1(97.9,26.3) 97.9,25.7 ; R102.1@102.1,20.5 102.4,20.5 103.975,22.075 104.1,22.075 104.1,23.1 103.5,23.7 101.3,23.7 99.3,25.7 97.9,25.7 ; C24.2@109,23.4 110.6,23.4 111.1,22.9 111.1,21 111.55,20.55 U16.3@113,20.55 ; v1(110.1,53.3) 110.1,50.805 111.88,49.025 111.88,47.625 C49.2@112.655,46.851 ; U11.3@110.74,56.5 112.74,56.5 U11.29@113.24,56 U11.18@115.74,56 ; 81.9,51.7 81.9,50.845 83.173,49.573
  Top Layer w0.6: D10.2@14.184,58.217 14.151,58.184 11.698,58.184 7.994,54.48 7.994,47.418 11.912,43.5 D5.1@17.2,43.5
  other v1: 8.8,14.7 9.6,14.7 8.8,15.5 9.6,15.5 99.2,15.5 8.8,16.3 9.6,16.3 17.8,19.8 17.8,20.6 1.3,21 2.1,21 2.9,21 1.3,21.8 2.1,21.8 2.9,21.8 59.3,23.4 60.1,23.4 26,23.5 26.8,23.5 27.6,23.5 28.4,23.5 29.2,23.5 30,23.5 107.1,23.5 107.9,23.5 59.3,24.2 60.1,24.2 26,24.3 26.8,24.3 27.6,24.3 28.4,24.3 29.2,24.3 30,24.3 107.1,24.3 107.9,24.3 59.3,25 60.1,25 107.1,25.1 107.9,25.1 1.3,25.8 2.1,25.8 2.9,25.8 59.3,25.8 60.1,25.8 107.1,25.9 107.9,25.9 1.3,26.6 2.1,26.6 2.9,26.6 54.7,31.2 54.7,32 54.7,32.8 58.5,33.5 59.3,33.5 60.1,33.5 60.9,33.5 61.7,33.5 62.5,33.5 54.7,33.6 58.5,34.3 59.3,34.3 60.1,34.3 60.9,34.3 61.7,34.3 62.5,34.3 54.7,34.4 10.1,34.7 10.9,34.7 11.7,34.7 12.5,34.7 40.3,35 41.1,35 58.5,35.1 59.3,35.1 10.1,35.5 10.9,35.5 11.7,35.5 12.5,35.5 40.3,35.8 41.1,35.8 58.5,35.9 59.3,35.9 40.3,36.6 41.1,36.6 63.6,38.1 64.4,38.1 65.6,38.1 66.4,38.1 43.4,38.3 44.2,38.3 45,38.3 45.8,38.3 46.6,38.3 75.3,38.6 76.1,38.6 76.9,38.6 63.6,38.9 64.4,38.9 65.6,38.9 66.4,38.9 40.3,39 41.1,39 43.4,39.1 44.2,39.1 45,39.1 45.8,39.1 46.6,39.1 75.3,39.4 76.1,39.4 76.9,39.4 63.6,39.7 64.4,39.7 65.6,39.7 66.4,39.7 40.3,39.8 41.1,39.8 63.6,40.5 64.4,40.5 65.6,40.5 66.4,40.5 40.3,40.6 41.1,40.6 27.6,41.9 28.4,41.9 29.2,41.9 30,41.9 27.5,42.7 28.3,42.7 29.1,42.7 29.9,42.7 75,45.412 85.4,45.5 90.394,47.1 119.4,47.5 106.474,47.6 35.2,47.8 36,47.8 36.8,47.8 37.6,47.8 38.4,47.8 39.2,47.8 40,47.8 40.8,47.8 41.6,47.8 35.2,48.6 36,48.6 36.8,48.6 37.6,48.6 38.4,48.6 39.2,48.6 40,48.6 40.8,48.6 41.6,48.6 30.688,50.206 31.488,50.206 30.688,51.006 31.488,51.006 30.688,51.806 31.488,51.806 30.7,52.6 31.5,52.6 30.7,53.4 31.5,53.4 118.5,56.452 119.3,56.452 120.1,56.452 30.7,56.5 31.5,56.5 118.5,57.252 119.3,57.252 120.1,57.252 30.7,57.3 31.5,57.3 118.5,58.052 119.3,58.052 120.1,58.052 30.7,58.1 31.5,58.1 118.5,58.852 119.3,58.852 120.1,58.852 77.2,59.812 78,59.812 78.8,59.812 91.394,59.8 92.194,59.8 92.994,59.8 105.494,59.8 106.294,59.8 107.094,59.8 1,61.8 1.7,61.8 2.4,61.8 1.5,64.4 2.2,64.4 63,65 1.5,65.1 2.2,65.1 76.594,65.3 89.9,65.292 90.674,65.3 103.98,65.292 104.754,65.3 117.26,65.292 118.06,65.292 118.834,65.3 44.1,65.4 44.9,65.4 45.7,65.4 46.5,65.4 76.62,66.052 90.7,66.052 104.78,66.052 118.86,66.052 44.1,66.2 44.9,66.2 45.7,66.2 46.5,66.2 76.62,66.852 90.7,66.852 104.78,66.852 118.86,66.852 76.62,67.652 90.7,67.652 104.78,67.652 118.86,67.652 76.62,68.452 90.7,68.452 104.78,68.452 118.86,68.452 60.6,70 61.4,70 60.6,70.8 61.4,70.8 60.6,71.6 61.4,71.6 78.4,72.532 91.1,72.582 58.3,72.6 59.1,72.6 59.9,72.6 60.7,72.6 78.4,73.332 91.1,73.382 58.3,73.4 59.1,73.4 59.9,73.4 60.7,73.4 78.4,74.132 91.1,74.182 78.4,74.932 91.1,74.982
  other v2: 74.814,15.7 74.814,16.3 108.464,34.7 108.5,36.632 89.5,37.8
HOLD: R65.1 U4.39 | length 9.7
  Top Layer w0.3: R65.1@86,22.1 87.6,23.7 88.4,23.7 89,24.3 89,25.6 89.3,25.9 91.85,25.9 92.15,26.2 U4.39@92.15,27.3
MA_DIR: U4.11
MA_STEP: U4.10
MOTOR_EN: R103.1 U4.18 U8.2 U9.2 U10.2 U11.2 | length 120.8
  Top Layer w0.3: 67.201,57.001 67.4,57.001 ; U8.2@68.5,57.001 67.4,57.001 ; v1(79.7,44.8) 79.7,46.8 79.3,47.2 79.3,54.5 81.801,57.001 U9.2@82.58,57.001 ; R103.1@92.4,38.4 93.1,38.4 v1(93.8,37.7) ; v1@93.75,37.65 94.15,37.25 U4.18@94.15,35.9 ; v1(93.8,45.97) 93.8,46.8 93.3,47.3 93.3,55.3 95.001,57.001 U10.2@96.66,57.001 ; 107.4,47.4 107.4,47.7 ; v1(107.5,40.9) 107,40.4 94,40.4 93.5,40.9 v2(93.2,40.9) v1(79.3,40.9) 77.5,40.9 72.8,45.6 66.4,45.6 65.1,46.9 65.1,55.3 66.801,57.001 67.4,57.001 ; v1(107.8,44.62) 107.8,46.9 107.4,47.3 107.4,47.7 ; U11.2@110.74,57.001 109.801,57.001 107.4,54.6 107.4,47.7
  Bottom Layer w0.3: v1(79.3,40.9) 79.3,44.4 v1(79.7,44.8) ; v1(93.8,37.7) 93.2,38.3 v2(93.2,40.9) 93.2,45.37 v1(93.8,45.97) ; v1(107.5,40.9) 107.5,44.32 v1(107.8,44.62)
MS1: P30.1 R49.1 U8.9 U9.9 U10.9 U11.9 | length 87.8
  Top Layer w0.3: v1(69.4,52.3) 69.999,52.899 U8.9@69.999,53.5 ; v1(83.48,52.3) 84.079,52.899 U9.9@84.079,53.5 ; v1(97.56,52.3) 98.159,52.899 U10.9@98.159,53.5 ; R49.1@111.1,31.6 114.2,31.6 118,35.4 118,37.76 P30.1@119.34,39.1 ; v1(111.64,52.3) 112.239,52.899 U11.9@112.239,53.5
  Bottom Layer w0.3: v1(69.4,52.3) 72,52.3 73.3,53.6 77.9,53.6 79.2,52.3 v1(83.48,52.3) 86.2,52.3 87.2,53.3 94.2,53.3 95.2,52.3 v1(97.56,52.3) 99.4,52.3 100.5,53.4 104.6,53.4 105.7,52.3 v1(111.64,52.3) 114.2,52.3 114.6,52.7 120.7,52.7 121.7,51.7 121.7,41.46 P30.1@119.34,39.1
MS2: P30.3 R50.1 U8.10 U9.10 U10.10 U11.10 | length 86.3
  Top Layer w0.3: v1(70.1,51.6) 70.5,52 U8.10@70.5,53.5 ; v1(84.18,51.6) 84.58,52 U9.10@84.58,53.5 ; v1(98.26,51.6) 98.66,52 U10.10@98.66,53.5 ; R50.1@111.1,33.7 113.4,33.7 115.5,35.8 115.5,37.8 P30.3@116.8,39.1 ; v1(112.34,51.6) 112.74,52 U11.10@112.74,53.5
  Bottom Layer w0.3: v1(70.1,51.6) 72.2,51.6 73.7,53.1 77.6,53.1 79.1,51.6 v1(84.18,51.6) 86.3,51.6 87.5,52.8 93.9,52.8 95.1,51.6 v1(98.26,51.6) 99.554,51.6 100.854,52.9 104.3,52.9 105.6,51.6 v1(112.34,51.6) 114.4,51.6 114.9,52.1 120.4,52.1 121.1,51.4 121.1,43.4 P30.3@116.8,39.1
MS3: P30.5 R51.1 U8.11 U9.11 U10.11 U11.11 | length 85.4
  Top Layer w0.3: v1(70.8,50.9) 71,51.1 U8.11@71,53.5 ; v1(84.88,50.9) 85.08,51.1 U9.11@85.08,53.5 ; v1(98.96,50.9) 99.16,51.1 U10.11@99.16,53.5 ; R51.1@111.1,35.8 114.26,38.96 P30.5@114.26,39.1 ; v1(113.04,50.9) 113.24,51.1 U11.11@113.24,53.5
  Bottom Layer w0.3: v1(70.8,50.9) 72.3,50.9 74,52.6 77.2,52.6 78.9,50.9 v1(84.88,50.9) 86.4,50.9 87.8,52.3 93.5,52.3 94.9,50.9 v1(98.96,50.9) 99.7,50.9 101.2,52.4 104,52.4 105.5,50.9 v1(113.04,50.9) 114.6,50.9 115.3,51.6 120.1,51.6 120.5,51.2 120.5,43.7 117.5,40.7 115.1,40.7 114.26,39.86 P30.5@114.26,39.1
MX_1A: P19.3 U8.24 | length 19.6
  Top Layer w0.3: U8.24@71.5,58.5 v1(71.5,60.9)
  Bottom Layer w0.8: P19.3@70.02,73.5 70.02,71.52 69,70.5 69,60.4 69.7,59.7 71,59.7 71.5,60.2 v1(71.5,60.9)
MX_1B: P19.4 pad.3@74.307,58.257 U8.21 | length 29.8
  Top Layer w0.3: U8.21@73.5,57.501 74.101,57.501 74.3,57.7
  Top Layer w0.6: 74.307,57.807 pad.3@74.307,58.257
  Bottom Layer w0.8: P19.4@67.48,73.5 67.48,74.48 68.3,75.3 76.4,75.3 76.8,74.9 76.8,71.4 74.307,68.907 pad.3@74.307,58.257
MX_2A: P19.2 U8.26 | length 15.9
  Top Layer w0.3: U8.26@70.5,58.5 v1(70.5,60.9)
  Bottom Layer w0.8: v1(70.5,60.9) 70.5,70 72.56,72.06 P19.2@72.56,73.5
MX_2B: P19.1 pad.0@67.75,58.3 U8.1 | length 21.8
  Top Layer w0.3: 67.75,57.85 68.099,57.501 U8.1@68.5,57.501
  Top Layer w0.6: 67.75,57.85 pad.0@67.75,58.3
  Bottom Layer w0.8: pad.0@67.75,58.3 71.5,58.3 72.781,59.581 72.781,69.981 75.1,72.3 P19.1@75.1,73.5
MX_DIR: J7.4 U4.17 U8.19 | length 37.5
  Top Layer w0.3: U8.19@73.5,56.5 74.1,56.5 76,54.6 ; v1(76,50.8) 76,54.6 ; 76,54 76,54.6 ; v1(81.3,40.2) 81.98,39.52 93.08,39.52 94.65,37.95 U4.17@94.65,35.9
  Bottom Layer w0.3: v1(76,50.8) 77.1,50.8 80.52,47.38 J7.4@80.52,43.4 80.52,40.98 v1(81.3,40.2)
MX_STEP: J7.2 U4.16 U8.16 | length 34.6
  Top Layer w0.3: U8.16@73.5,54.999 74.025,54.999 74.5,54.524 v1(74.5,51.9) ; v1@85.6,40.1 v1(85.6,40.2) 93.3,40.2 93.85,39.65 95.15,38.35 U4.16@95.15,35.9
  Bottom Layer w0.3: v1(74.5,51.9) 77.1,51.9 J7.2@85.6,43.4 v1(85.6,40.2) v1@85.6,40.1
MY1_1A: P20.3 U9.24 | length 19
  Top Layer w0.3: U9.24@85.58,58.5 v1(85.58,60.9)
  Bottom Layer w0.8: P20.3@82.8,73.5 82.8,61 84,59.8 85.1,59.8 85.58,60.28 v1(85.58,60.9)
MY1_1B: P20.4 pad.3@88.387,58.257 U9.21 | length 29.4
  Top Layer w0.3: U9.21@87.58,57.501 88.181,57.501 88.38,57.7
  Top Layer w0.6: 88.387,57.807 pad.3@88.387,58.257
  Bottom Layer w0.8: P20.4@80.26,73.5 80.26,74.66 80.9,75.3 89.1,75.3 89.7,74.7 89.7,71.3 88.387,69.987 pad.3@88.387,58.257
MY1_2A: P20.2 U9.26 | length 15.3
  Top Layer w0.3: U9.26@84.58,58.5 v1(84.58,60.9)
  Bottom Layer w0.8: v1(84.58,60.9) 84.58,71.08 85.34,71.84 P20.2@85.34,73.5
MY1_2B: P20.1 pad.0@81.83,58.3 U9.1 | length 21.1
  Top Layer w0.3: 81.83,57.85 82.179,57.501 U9.1@82.58,57.501
  Top Layer w0.6: 81.83,57.85 pad.0@81.83,58.3
  Bottom Layer w0.8: pad.0@81.83,58.3 85.3,58.3 86.861,59.861 86.861,70.461 87.88,71.48 P20.1@87.88,73.5
MY2_1A: P21.2 U10.24 | length 15.6
  Top Layer w0.3: U10.24@99.66,58.5 v1(99.66,60.9)
  Bottom Layer w0.8: P21.2@98.1,73.5 98.1,64 99.66,62.44 v1(99.66,60.9)
MY2_1B: P21.1 pad.3@102.467,58.257 U10.21 | length 17.3
  Top Layer w0.3: U10.21@101.66,57.501 102.261,57.501 102.46,57.7
  Top Layer w0.6: 102.467,57.807 pad.3@102.467,58.257
  Bottom Layer w0.8: P21.1@100.64,73.5 102.467,71.673 pad.3@102.467,58.257
MY2_2A: P21.3 U10.26 | length 16.3
  Top Layer w0.3: U10.26@98.66,58.5 v1(98.66,60.9)
  Bottom Layer w0.8: P21.3@95.56,73.5 95.56,63.999 v1(98.66,60.9)
MY2_2B: P21.4 pad.0@95.91,58.3 U10.1 | length 17.7
  Top Layer w0.3: 95.91,57.85 96.259,57.501 U10.1@96.66,57.501
  Top Layer w0.6: 95.91,57.85 pad.0@95.91,58.3
  Bottom Layer w0.8: P21.4@93.02,73.5 93.02,64.48 95.91,61.59 pad.0@95.91,58.3
MY_DIR: J8.4 J9.4 U4.15 U9.19 U10.19 | length 53
  Top Layer w0.3: U9.19@87.58,56.5 88.18,56.5 88.99,55.69 90.08,54.6 90.08,54.2 ; v1(90,50.9) 90.08,50.98 90.08,54.2 ; 90.08,54 90.08,54.2 ; J8.4@94.61,44.6 95.81,43.4 100.6,43.4 v1(100.9,43.7) ; U4.15@95.65,35.9 95.65,38.45 v1(95.9,38.7) ; U10.19@101.66,56.5 102.26,56.5 104.1,54.66 v1(104.1,51.1)
  Bottom Layer w0.3: v1(90,50.9) 93.18,50.9 94.61,49.47 J8.4@94.61,44.6 94.61,44.5 J9.4@94.61,41.6 ; J9.4@94.61,41.4 J9.4@94.61,41.6 ; J9.4@95.05,41.16 J9.4@94.61,41.6 ; v1(95.9,38.7) 95.9,40.31 J9.4@94.61,41.6 ; v1(100.9,43.7) 101.5,43.1 103.2,43.1 105.3,45.2 105.3,49.9 v1(104.1,51.1)
MY_STEP: J8.2 J9.2 U4.14 U9.16 U10.16 | length 39.5
  Top Layer w0.3: U9.16@87.58,54.999 88.105,54.999 88.58,54.524 88.58,51.62 v1(88.6,51.6) ; U4.14@96.15,35.9 96.15,37.35 v1(98.2,39.4) ; U10.16@101.66,54.999 102.185,54.999 102.66,54.524 102.66,54.2 ; v1(102.6,51.7) 102.66,51.76 102.66,54.2 ; 102.66,54 102.66,54.2
  Bottom Layer w0.3: v1(88.6,51.6) 93.3,51.6 96.81,48.09 99.69,48.09 ; v1(98.2,39.4) 99.69,40.89 J9.2@99.69,41.6 ; J9.2@99.8,41.49 J9.2@99.69,41.6 ; v1(102.6,51.7) 102.6,51 99.69,48.09 ; J9.2@99.69,41.6 J8.2@99.69,44.6 99.69,48.09
MZ_1A: P22.2 U11.24 | length 16.2
  Top Layer w0.3: U11.24@113.74,58.5 v1(113.74,60.9)
  Bottom Layer w0.8: P22.2@110.88,73.5 110.88,72.068 113.74,69.208 113.74,61.96 113.74,61.4 v1(113.74,60.9)
MZ_1B: P22.1 pad.3@116.547,58.257 U11.21 | length 17.9
  Top Layer w0.3: U11.21@115.74,57.501 116.341,57.501 116.54,57.7
  Top Layer w0.6: 116.547,57.807 pad.3@116.547,58.257
  Bottom Layer w0.8: P22.1@113.42,73.5 113.42,71.6 115.3,69.72 115.3,59.504 pad.3@116.547,58.257
MZ_2A: P22.3 U11.26 | length 16.8
  Top Layer w0.3: U11.26@112.74,58.5 v1(112.74,60.9)
  Bottom Layer w0.8: P22.3@108.34,73.5 108.34,72.508 112.4,68.448 112.4,61.239 v1(112.74,60.9)
MZ_2B: P22.4 pad.0@109.99,58.3 U11.1 | length 18.3
  Top Layer w0.3: 109.99,57.85 110.339,57.501 U11.1@110.74,57.501
  Top Layer w0.6: 109.99,57.85 pad.0@109.99,58.3
  Bottom Layer w0.8: P22.4@105.8,73.5 105.8,73 109.99,68.81 pad.0@109.99,58.3